# Altium PCB PCB1.PcbDoc
Units mm, origin at the board's own origin, x right, y up, seen from the top; angles counter-clockwise.
Board outline 75.06 x 79.25 mm, 2 copper layers (Top Layer, Bottom Layer); 20 components, 16 nets, 56 pads, 0 vias.
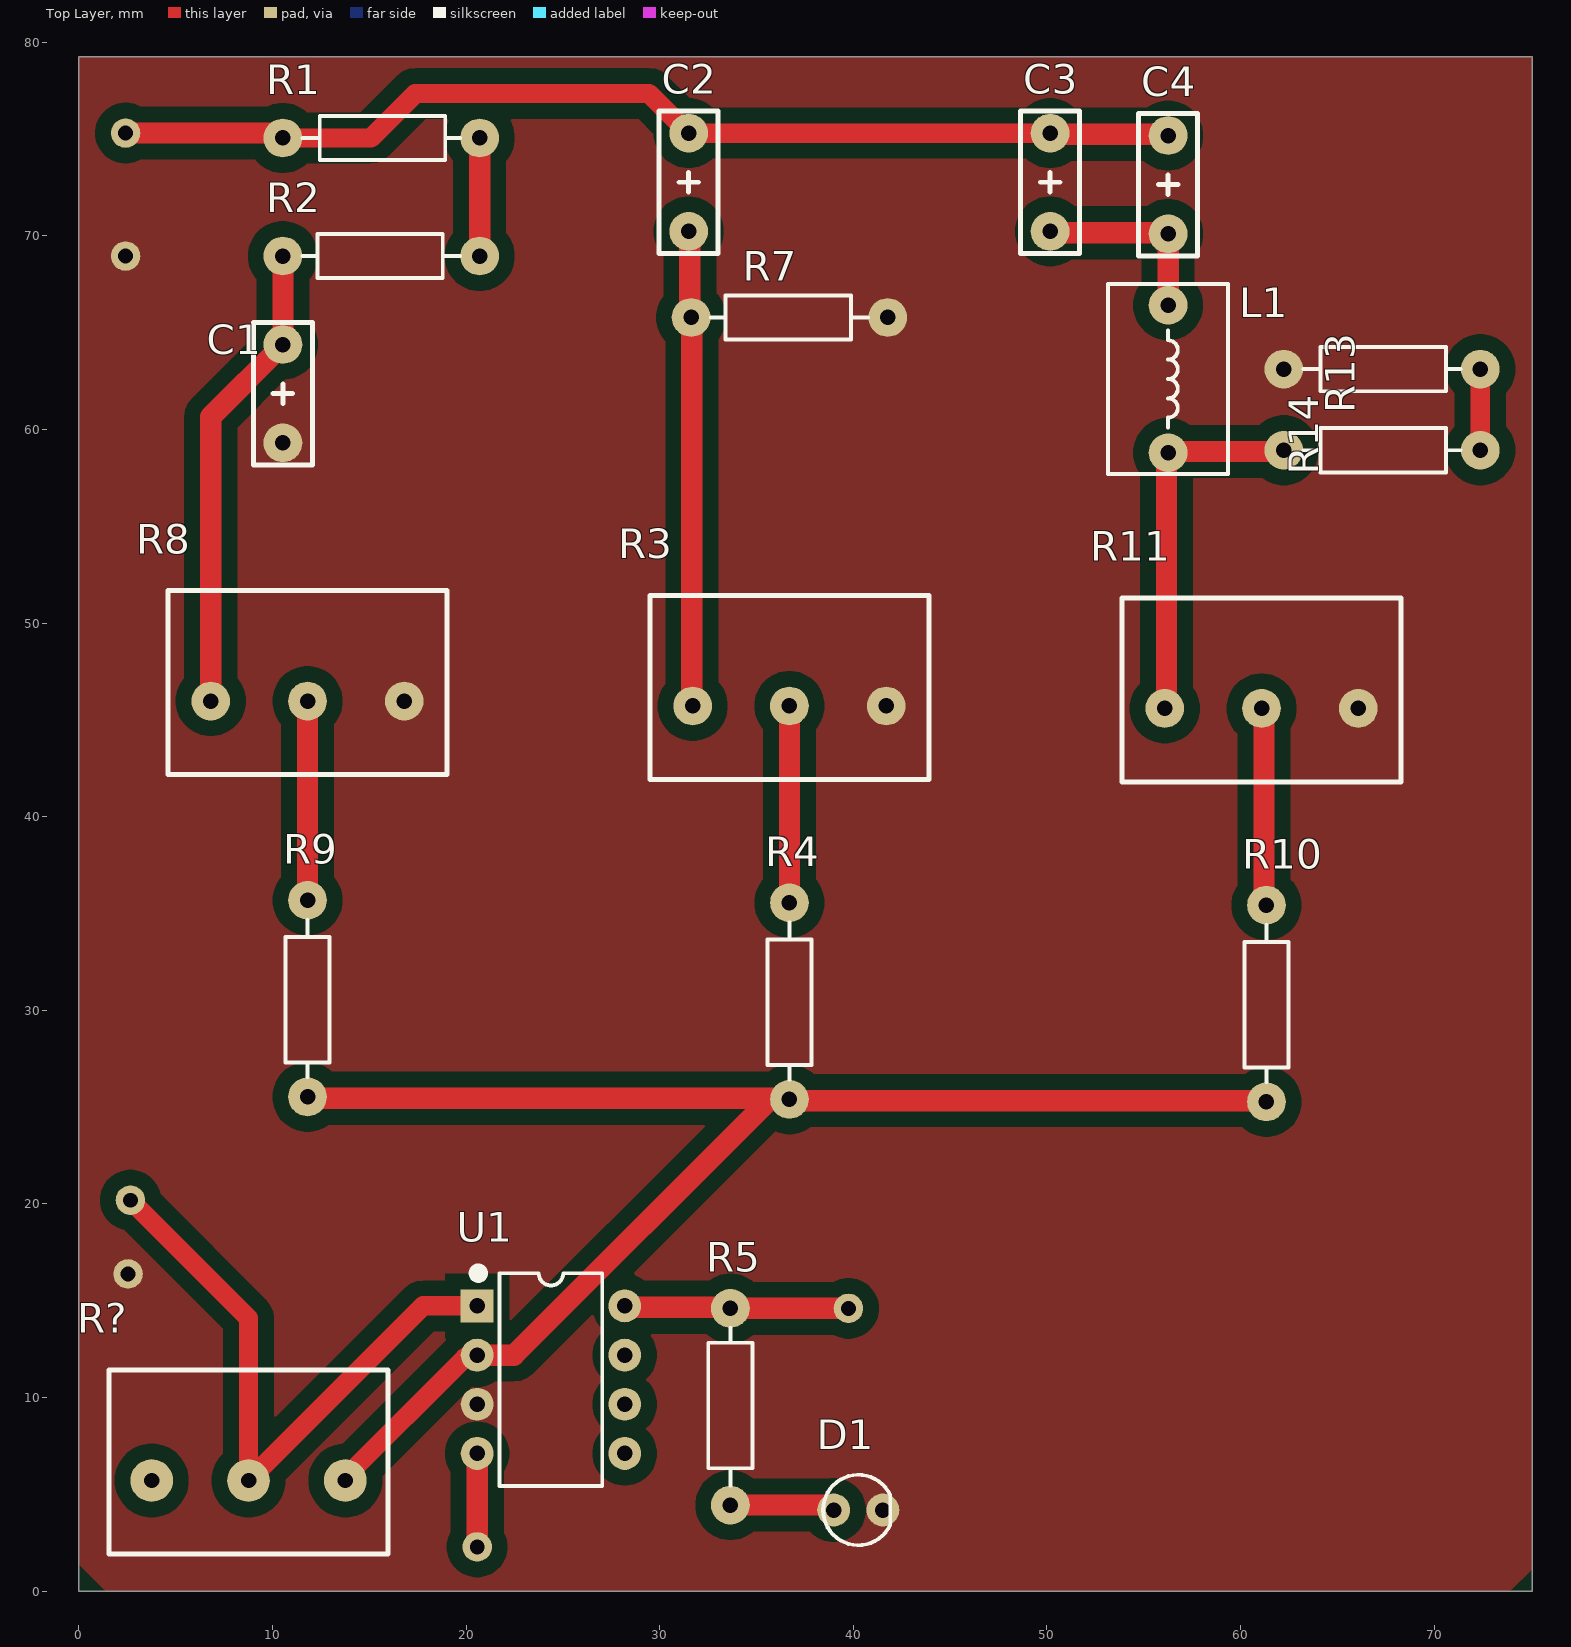
[diagram p0: Top Layer view]
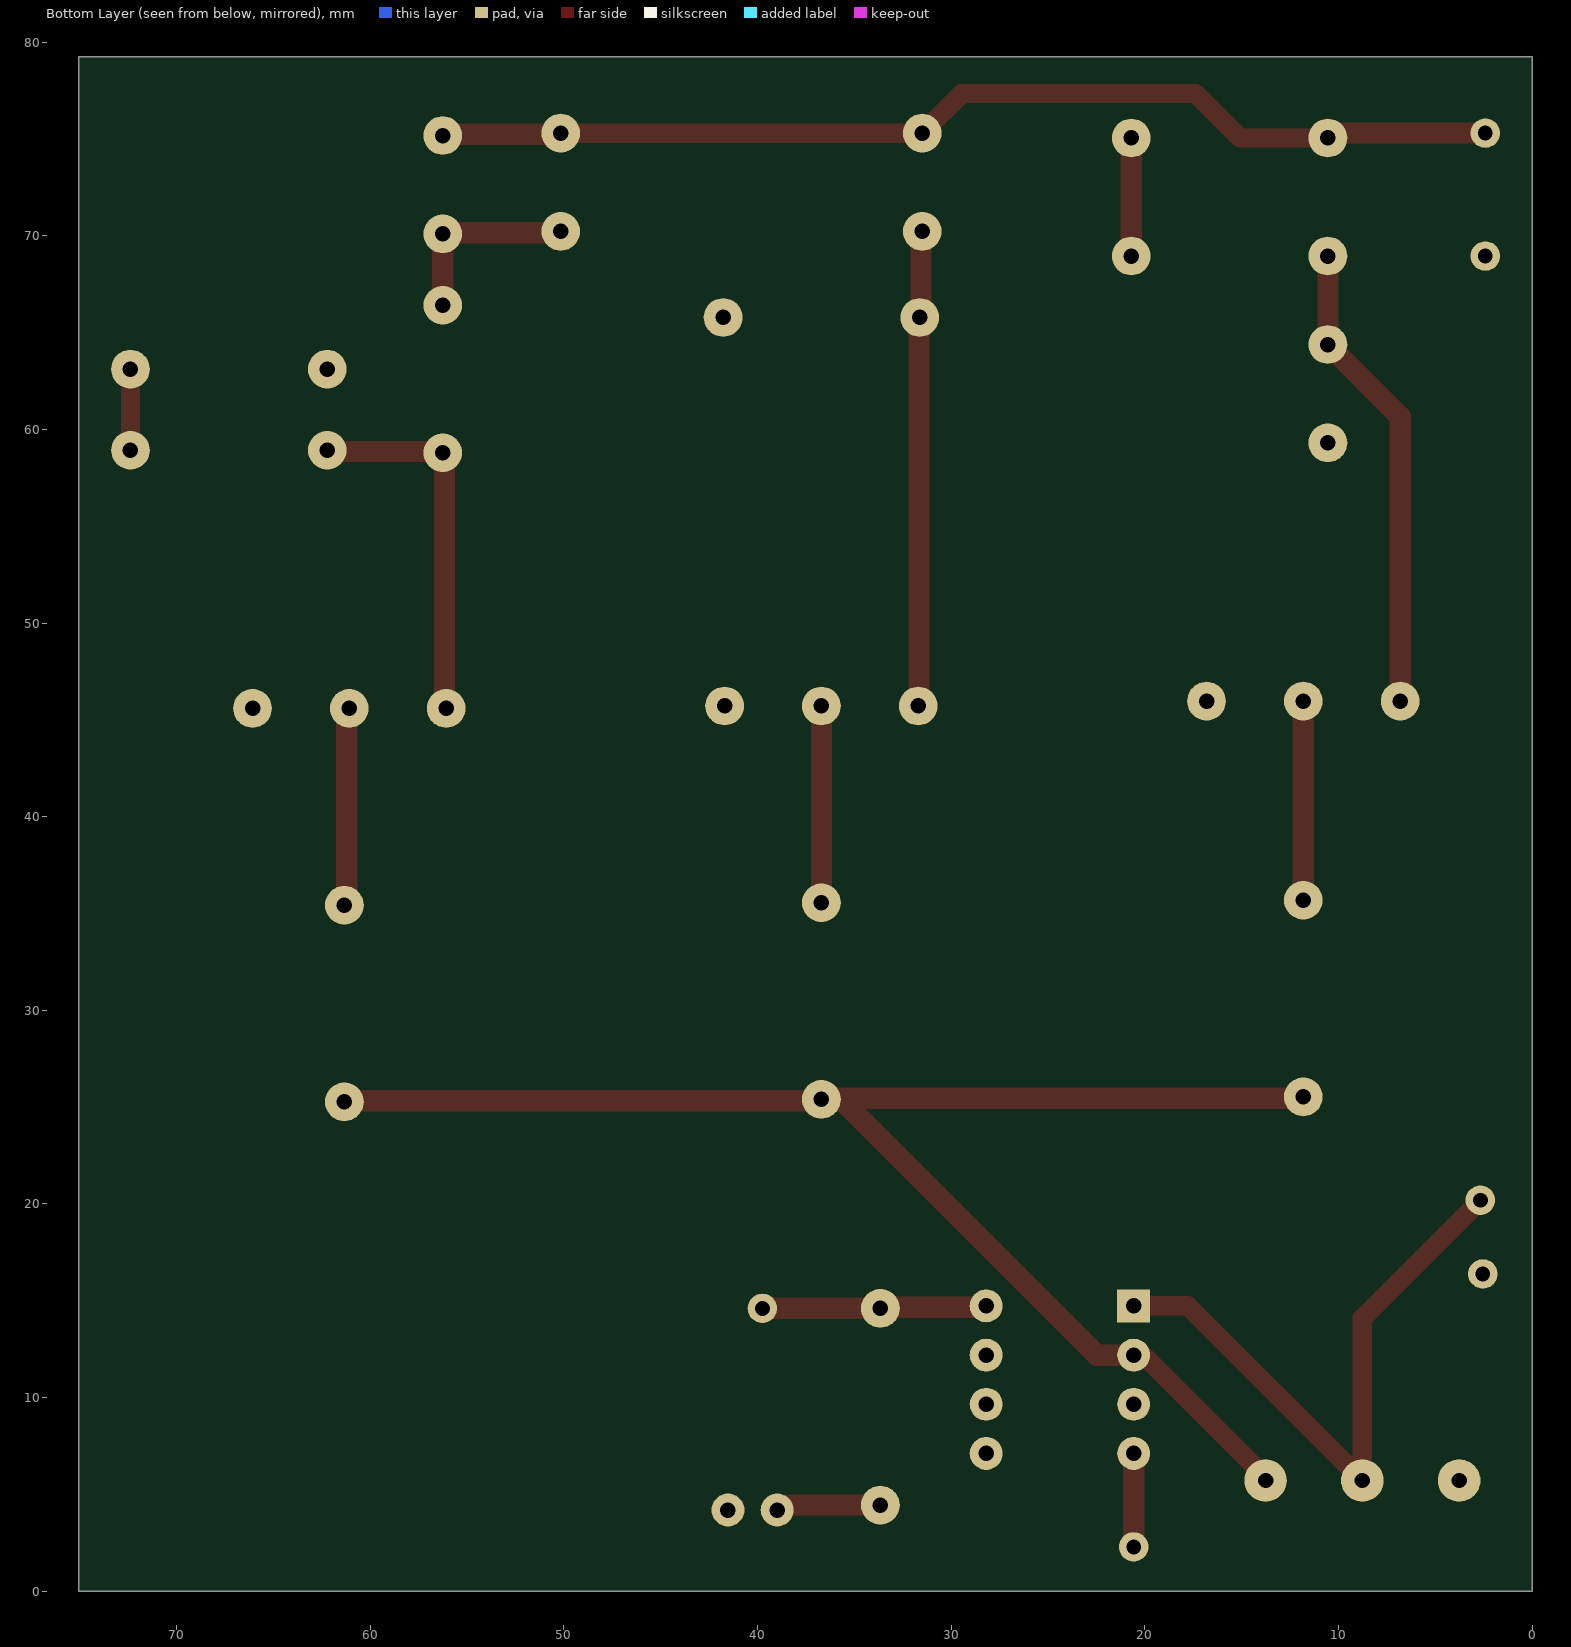
[diagram p1: Bottom Layer view, seen from below]
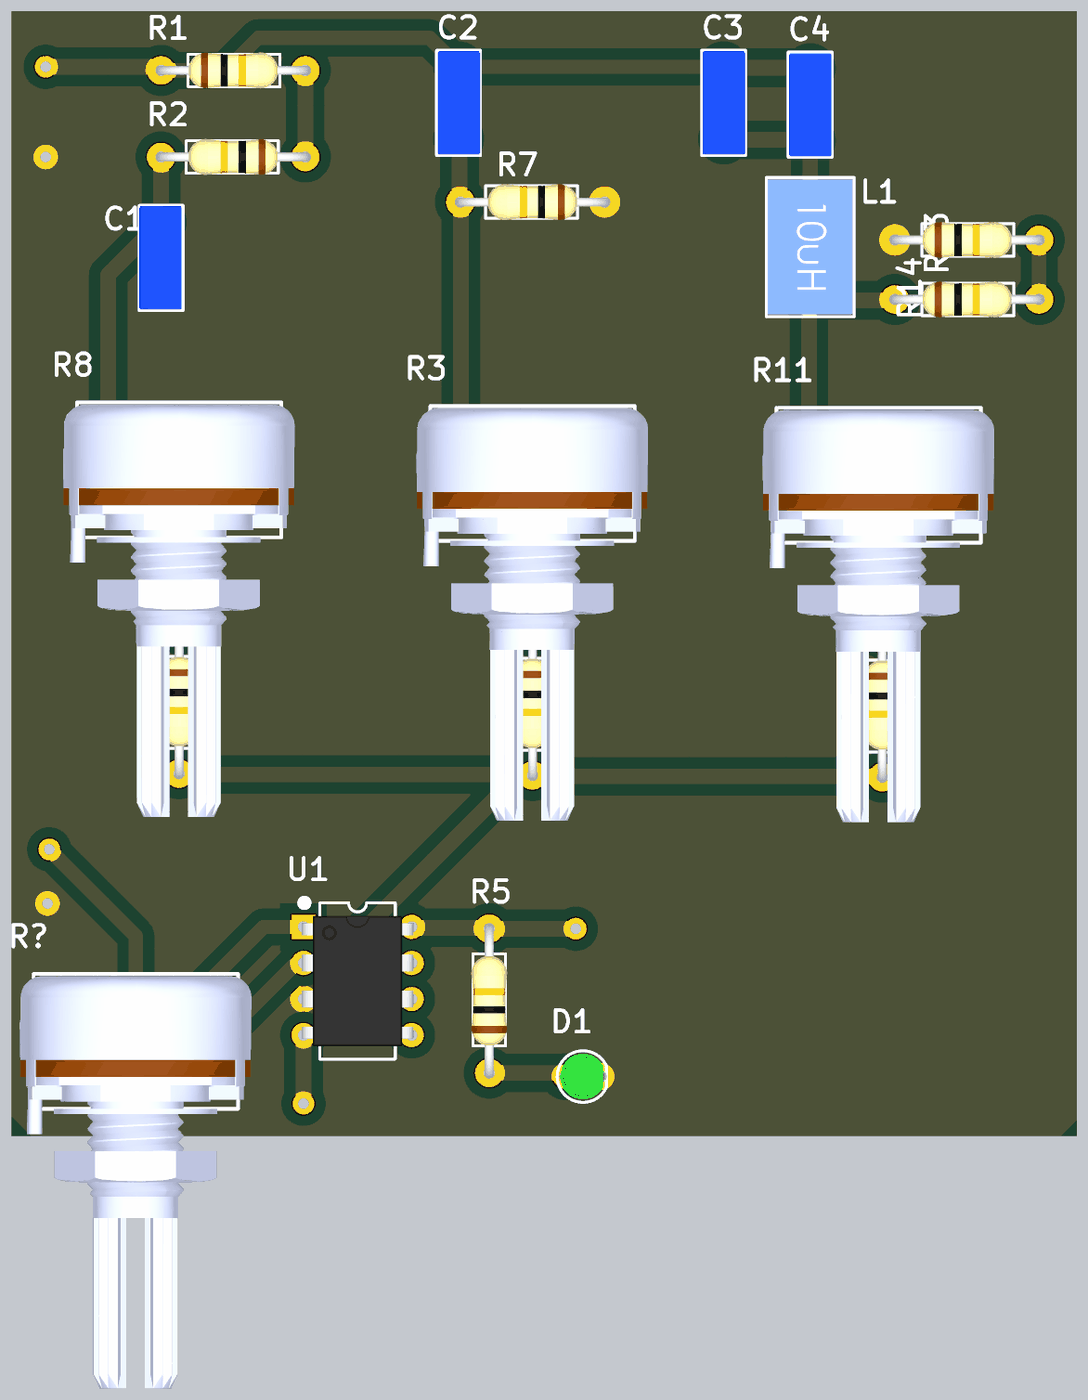
[diagram p2: 3D render of the assembled board from above, using the file's embedded part models]

## Layer stack, top to bottom
Top Solder: solder mask 0.0102, Solder Resist, Dk 3.5
Top Layer: signal copper 0.0356
Dielectric 1: dielectric 0.32, FR-4, Dk 4.8
Bottom Layer: signal copper 0.0356
Bottom Solder: solder mask 0.0102, Solder Resist, Dk 3.5

## Board outline
0,0 75.057,0 75.057,79.248 0,79.248

## Design rules (kind name [scope] priority, off if disabled: settings)
Clearance [All] p1: gap=0.8 ignorepadtopadclearanceinfootprint=FALSE except(0: Arc-Text Track-Text SMDPad-Text THPad-Text Via-Text Fill-Text Poly-Text Region-Text Text-Text)
ComponentClearance [All] p1: gap=0.3 collisioncheckmode=3 verticalgap=0.254 showdistances=FALSE
HoleSize HoleSize_1 [All] p1: absolutevalues=TRUE maxlimit=1 minlimit=0.6 maxpercent=80.000 minpercent=20.000
HoleToHoleClearance [All] p1: gap=0.1 allowstackedmicrovias=TRUE
MinimumSolderMaskSliver [All] p1: minsoldermaskwidth=0.05
PolygonConnect [All] p1: connectstyle=Relief reliefconductorwidth=0.4 reliefentries=4 polygonreliefangle="90 Angle" airgapwidth=0.4
RoutingVias [All] p1: holewidth=0.9 width=2 viastyle="Through Hole" minholewidth=0.9 minwidth=2 maxholewidth=0.9 maxwidth=2
SilkToSilkClearance [All] p1: silktosilkclearance=0
SilkToSolderMaskClearance [IsPad] p1: minsilkscreentomaskgap=0 clearancetoexposedcopper=TRUE
SolderMaskExpansion [All] p1: expansion=0.102 istentingtop=FALSE
Width [All] p1: maxlimit=1.2 minlimit=1 preferedwidth=1 minimp=50.000000 maximp=50.000000 favimp=50.000000
24 further rules are at their usual default settings.

## Components (designator, comment, footprint, x,y, rotation, side; value= is the part's Value field where it differs from the comment)
C1 "Cap Film 0.1uF" "Cap Film 0.1uF" 10.541,61.849 r270 top
C2 "Cap Film 0.1uF" "Cap Film 0.1uF" 31.496,72.771 r90 top
C3 "Cap Film 0.1uF" "Cap Film 0.1uF" 50.165,72.771 r90 top
C4 "Cap Film 0.1uF" "Cap Film 0.1uF" 56.261,72.644 r90 top
D1 "LED 3MM GREEN" "LED 3MM GREEN" 40.259,4.191 r0 top
L1 "68mH" "IND RAD 5MM" 56.261,62.611 r270 top
R1 "RES 470R 1/4W CARBON FILM" "RES 10K 1/4W CARBON FILM" 15.621,75.057 r0 top
R2 "RES 470R 1/4W CARBON FILM" "RES 10K 1/4W CARBON FILM" 15.621,68.961 r180 top
R3 "Pot 10k" "Pot 10k"#1 36.703,45.72 r180 top
R4 "RES 470R 1/4W CARBON FILM" "RES 10K 1/4W CARBON FILM" 36.703,30.48 r270 top
R5 "RES 470R 1/4W CARBON FILM" "RES 10K 1/4W CARBON FILM" 33.655,9.525 r90 top
R7 "RES 470R 1/4W CARBON FILM" "RES 10K 1/4W CARBON FILM" 36.703,65.786 r180 top
R8 "Pot 10k" "Pot 10k"#1 11.811,45.974 r180 top
R9 "RES 470R 1/4W CARBON FILM" "RES 10K 1/4W CARBON FILM" 11.811,30.607 r270 top
R10 "RES 470R 1/4W CARBON FILM" "RES 10K 1/4W CARBON FILM" 61.341,30.353 r270 top
R11 "Pot 10k" "Pot 10k"#1 61.087,45.593 r180 top
R13 "RES 470R 1/4W CARBON FILM" "RES 10K 1/4W CARBON FILM" 67.31,58.928 r0 top
R14 "RES 470R 1/4W CARBON FILM" "RES 10K 1/4W CARBON FILM" 67.31,63.119 r0 top
R? "Pot 10k" "Pot 10k"#2 8.763,5.715 r180 top
U1 "741" P008 24.384,10.922 r270 top

## Footprints (in the part's own frame and the unit in brackets; to place one, negate y for a bottom-side part, rotate by r counter-clockwise, add the part's x,y. Pads: shape width x height; smd on the part's side, far side on the other; paste and mask are expansions set on the pad)
"Cap Film 0.1uF" [mm] "Cap Film 0.1uF"
  round 2 hole 0.8: 1(2.54,0) 2(-2.54,0)
  silkscreen extent -3.68,-1.52 3.68,1.52, body extent -3.65,-1.52 3.65,1.48, height 6
"IND RAD 5MM" [mm]
  round 2 hole 0.8: 1(-3.81,0) 2(3.81,0)
  silkscreen extent -4.9,-3.1 4.9,3.1, body extent -4.76,-3 4.74,3, height 7
"LED 3MM GREEN" [mm]
  round 1.7 hole 0.8: 1(-1.27,0) 2(1.27,0)
  silkscreen extent -1.82,-1.82 1.65,1.82, body extent -1.6,-1.6 1.57,1.6, height 5.85
P008 [mm] "DIP; 8 Leads; Row Spacing 7.62 mm; Pitch 2.54 mm"
  rect 1.7x1.7 hole 0.8: 1(-3.81,-3.81)
  round 1.7 hole 0.8: 2(-1.27,-3.81) 3(1.27,-3.81) 4(3.81,-3.81) 5(3.81,3.81) 6(1.27,3.81) 7(-1.27,3.81) 8(-3.81,3.81)
  silkscreen extent -5.75,-4 5.5,2.65, body extent -4.6,-3.93 4.6,3.94, height 3.85
"Pot 10k"#1 [mm]
  round 2 hole 0.8: 1(-5,0) 2(0,0) 3(5,0)
  silkscreen extent -7.2,-5.7 7.2,3.8, body extent -8.15,-5.55 8.19,23.49, height 21.17
"Pot 10k"#2 [mm]
  round 2.2 hole 0.8: 1(-5,0) 2(0,0) 3(5,0)
  silkscreen extent -7.2,-5.7 7.2,3.8, body extent -8.15,-5.55 8.19,23.49, height 21.17
"RES 10K 1/4W CARBON FILM" [mm]
  round 2 hole 0.8: 1(-5.08,0) 2(5.08,0)
  silkscreen extent -4.06,-1.14 4.06,1.14, body extent -5.47,-1.27 5.47,1.27, height 3.27

## Part data
C1: library part "Cap Film 0.1uF - B32529C104K", "Cap Film 0.1uF 63V PET 10% (7.2 X 2.5 X 6.5mm) Radial 5mm 125C Bulk", Capacitance=330nF, Case/Package=Radial, Dielectric=PET, Insulation Resistance=15GR, Manufacturer="TDK EPCOS", Manufacturer Part Number=B32529C104K, Max Operating Temperature=125°C, Min Operating Temperature=-55°C, Package Quantity=2000, Supplier Part Number 1=21C0469, Tolerance=10%, Voltage Rating=63V, Voltage Rating (AC)=40V, ComponentLink1Description=http://www.farnell.com/datasheets/8708.pdf?src-supplier=Element14, ComponentLink1URL=http://www.farnell.com/datasheets/8708.pdf?src-supplier=Element14, ComponentLink2Description=https://www.distrelec.biz/Web/Downloads/_t/ds/b3252x_eng_tds.pdf?mime=application%2Fpdf&src-supplier=Distrelec, ComponentLink2URL=https://www.distrelec.biz/Web/Downloads/_t/ds/b3252x_eng_tds.pdf?mime=application%2Fpdf&src-supplier=Distrelec, ComponentLink3Description=http://www.farnell.com/datasheets/1955213.pdf?src-supplier=Farnell, ComponentLink3URL=http://www.farnell.com/datasheets/1955213.pdf?src-supplier=Farnell, ComponentLink4Description=https://www.verical.com/server-webapp/html/getDatasheet?partID=117180&src-supplier=Verical, ComponentLink4URL=https://www.verical.com/server-webapp/html/getDatasheet?partID=117180&src-supplier=Verical, ComponentLink5Description=https://produktinfo.conrad.com/datenblaetter/500000-524999/500871-da-01-en-METALLPOLYESTER_KONDENSATOR_0_10_UF.pdf?src-supplier=Conrad, ComponentLink5URL=https://produktinfo.conrad.com/datenblaetter/500000-524999/500871-da-01-en-METALLPOLYESTER_KONDENSATOR_0_10_UF.pdf?src-supplier=Conrad, Contact Plating=Matte,Tin, Depth=2.5mm, Dielectric Material=PET, Height=6.5mm, Height - Seated (Max)=0.256inch, Lead Diameter=0.5mm, Lead Free="Lead Free", Lead Length=6mm, Lead Pitch=5mm, Length=7.2mm, Life (Hours)=200000Hour, Material=PVC,Resin, Mount="PCB,Through Hole", Number of Pins=2, Packaging=Bulk, Pitch=5mm, Radiation Hardening=No, REACH SVHC="No SVHC", Stock 1=0, Supplier 1=Newark, Termination=Radial, Voltage Rating (DC)=63V, Width=2.5mm
C2 C4: library part "Cap Film 0.1uF - B32529C104K", "Cap Film 0.1uF 63V PET 10% (7.2 X 2.5 X 6.5mm) Radial 5mm 125C Bulk", Capacitance=47nF, Case/Package=Radial, Dielectric=PET, Insulation Resistance=15GR, Manufacturer="TDK EPCOS", Manufacturer Part Number=B32529C104K, Max Operating Temperature=125°C, Min Operating Temperature=-55°C, Package Quantity=2000, Supplier Part Number 1=21C0469, Tolerance=10%, Voltage Rating=63V, Voltage Rating (AC)=40V, ComponentLink1Description=http://www.farnell.com/datasheets/8708.pdf?src-supplier=Element14, ComponentLink1URL=http://www.farnell.com/datasheets/8708.pdf?src-supplier=Element14, ComponentLink2Description=https://www.distrelec.biz/Web/Downloads/_t/ds/b3252x_eng_tds.pdf?mime=application%2Fpdf&src-supplier=Distrelec, ComponentLink2URL=https://www.distrelec.biz/Web/Downloads/_t/ds/b3252x_eng_tds.pdf?mime=application%2Fpdf&src-supplier=Distrelec, ComponentLink3Description=http://www.farnell.com/datasheets/1955213.pdf?src-supplier=Farnell, ComponentLink3URL=http://www.farnell.com/datasheets/1955213.pdf?src-supplier=Farnell, ComponentLink4Description=https://www.verical.com/server-webapp/html/getDatasheet?partID=117180&src-supplier=Verical, ComponentLink4URL=https://www.verical.com/server-webapp/html/getDatasheet?partID=117180&src-supplier=Verical, ComponentLink5Description=https://produktinfo.conrad.com/datenblaetter/500000-524999/500871-da-01-en-METALLPOLYESTER_KONDENSATOR_0_10_UF.pdf?src-supplier=Conrad, ComponentLink5URL=https://produktinfo.conrad.com/datenblaetter/500000-524999/500871-da-01-en-METALLPOLYESTER_KONDENSATOR_0_10_UF.pdf?src-supplier=Conrad, Contact Plating=Matte,Tin, Depth=2.5mm, Dielectric Material=PET, Height=6.5mm, Height - Seated (Max)=0.256inch, Lead Diameter=0.5mm, Lead Free="Lead Free", Lead Length=6mm, Lead Pitch=5mm, Length=7.2mm, Life (Hours)=200000Hour, Material=PVC,Resin, Mount="PCB,Through Hole", Number of Pins=2, Packaging=Bulk, Pitch=5mm, Radiation Hardening=No, REACH SVHC="No SVHC", Stock 1=0, Supplier 1=Newark, Termination=Radial, Voltage Rating (DC)=63V, Width=2.5mm
C3: library part "Cap Film 0.1uF - B32529C104K", "Cap Film 0.1uF 63V PET 10% (7.2 X 2.5 X 6.5mm) Radial 5mm 125C Bulk", Capacitance=220nF, Case/Package=Radial, Dielectric=PET, Insulation Resistance=15GR, Manufacturer="TDK EPCOS", Manufacturer Part Number=B32529C104K, Max Operating Temperature=125°C, Min Operating Temperature=-55°C, Package Quantity=2000, Supplier Part Number 1=21C0469, Tolerance=10%, Voltage Rating=63V, Voltage Rating (AC)=40V, ComponentLink1Description=http://www.farnell.com/datasheets/8708.pdf?src-supplier=Element14, ComponentLink1URL=http://www.farnell.com/datasheets/8708.pdf?src-supplier=Element14, ComponentLink2Description=https://www.distrelec.biz/Web/Downloads/_t/ds/b3252x_eng_tds.pdf?mime=application%2Fpdf&src-supplier=Distrelec, ComponentLink2URL=https://www.distrelec.biz/Web/Downloads/_t/ds/b3252x_eng_tds.pdf?mime=application%2Fpdf&src-supplier=Distrelec, ComponentLink3Description=http://www.farnell.com/datasheets/1955213.pdf?src-supplier=Farnell, ComponentLink3URL=http://www.farnell.com/datasheets/1955213.pdf?src-supplier=Farnell, ComponentLink4Description=https://www.verical.com/server-webapp/html/getDatasheet?partID=117180&src-supplier=Verical, ComponentLink4URL=https://www.verical.com/server-webapp/html/getDatasheet?partID=117180&src-supplier=Verical, ComponentLink5Description=https://produktinfo.conrad.com/datenblaetter/500000-524999/500871-da-01-en-METALLPOLYESTER_KONDENSATOR_0_10_UF.pdf?src-supplier=Conrad, ComponentLink5URL=https://produktinfo.conrad.com/datenblaetter/500000-524999/500871-da-01-en-METALLPOLYESTER_KONDENSATOR_0_10_UF.pdf?src-supplier=Conrad, Contact Plating=Matte,Tin, Depth=2.5mm, Dielectric Material=PET, Height=6.5mm, Height - Seated (Max)=0.256inch, Lead Diameter=0.5mm, Lead Free="Lead Free", Lead Length=6mm, Lead Pitch=5mm, Length=7.2mm, Life (Hours)=200000Hour, Material=PVC,Resin, Mount="PCB,Through Hole", Number of Pins=2, Packaging=Bulk, Pitch=5mm, Radiation Hardening=No, REACH SVHC="No SVHC", Stock 1=0, Supplier 1=Newark, Termination=Radial, Voltage Rating (DC)=63V, Width=2.5mm
D1: Current If Luminous Intensity=20, Forward Voltage=2.2, Forward Voltage VF Max=2.5, LED Colour=Green, Manufacturer=Paralight, Manufacturer Part Number=IMP1019, Operating Temperature Max=85, Operating Temperature Min=-40, Operating Temperature Range="-40°C to +85", Peak Forward Current=140, Supplier Part Number 1="Led 3mm Verde Difuso L-314GD - Paralight", Voltage Vf Typ="2.2V<!--FANDB--><div class=\"features-and-benefits-container\"><div class=\"features-and-benefits-description\"><span class=\"features-benefits-value\">The L-934GD is a 3mm green solid-state LED Lamp with green diffused lens. The green source device is made with gallium phosphide.</span></div><div class=\"features-and-benefits-list\"><ul class=\"features-and-benefits-list-list\"><li class=\"features-and-benefits-list-item\">Low Power Consumption</li><li class=\"features-and-benefits-list-item\">Popular T-1 Diameter Package</li><li class=\"features-and-benefits-list-item\">General Purpose Leads</li><li class=\"features-and-benefits-list-item\">Reliable and Rugged</li><li class=\"features-and-benefits-list-item\">Long Life, Solid State Reliability</li></ul></div><div class=\"features-and-benefits-warnings\"><span class=\"features-benefits-value\">ESD sensitive device, take proper precaution while handling the device, wear anti-static suit when entering work areas with conductive machinery.</span></div><div class=\"features-and-benefits-applications\"><ul class=\"features-and-benefits-value\"><li class=\"features-and-benefits-list-item\">LED Lighting</li></ul></div></div>", Bulb Size=3mm, ComponentLink1Description=http://loja.multcomercial.com.br/led-3mm-verde-difuso-l-314gd-paralight.html, ComponentLink1URL=http://loja.multcomercial.com.br/led-3mm-verde-difuso-l-314gd-paralight.html, Dominant Wavelength=568, External Diameter=2.9, External Length / Height=4.6, Forward Current If=20, Forward Current If Max=20, Lead Cross-section Depth=0.5, Lead Cross-section Width=0.5, Lead Length=27, Lead Spacing=2.54, LED / Lamp Size="3mm / T-1", LED Mounting="Through Hole", LED Type=Standard, Lens Shape=Round, Luminous Intensity=20, Luminous Intensity @ If Min=8, Luminous Intensity Typ=20, Mounting Type="PCB Through Hole", MSL=-, No. of Pins=2, Packaging=Each, Peak Wavelength=568, PIV Max=5, Pricing 1="1=0,15 (BRL)", RoHS=YES, Stock 1=34348, Supplier 1="Mult Comercial", SVHC="No SVHC (15-Jun-2015)", Viewing Angle=60°, Wavelength Typ=568
L1: library part "Indutor 39 uH", "FIXED IND 39UH 1A 195 MOHM SMD", Case/Package=Nonstandard, Current Rating=1A, DC Resistance (DCR)=195mR, Inductance=39uH, Manufacturer=Bourns, Manufacturer Part Number=SRR6028-390Y, Max Operating Temperature=125°C, Min Operating Temperature=-40°C, Package Quantity=500, Saturation Current=750mA, Self Resonant Frequency=17MHz, Test Frequency=100kHz, Tolerance=30%, ComponentLink1Description=http://www.bourns.com/docs/Product-Datasheets/SRR6028.pdf?src-supplier=Digi-Key, ComponentLink1URL=http://www.bourns.com/docs/Product-Datasheets/SRR6028.pdf?src-supplier=Digi-Key, ComponentLink2Description=https://www.bourns.com/docs/Product-Datasheets/SRR6028.pdf?src-supplier=Digi-Key, ComponentLink2URL=https://www.bourns.com/docs/Product-Datasheets/SRR6028.pdf?src-supplier=Digi-Key, ComponentLink3Description=http://www.bourns.com/pdfs/SRR6028.pdf?src-supplier=Avnet+Europe, ComponentLink3URL=http://www.bourns.com/pdfs/SRR6028.pdf?src-supplier=Avnet+Europe, Composition=Wirewound, Core Material=Ferrite, Height=2.8mm, Height - Seated (Max)=0.118inch, Length=0.268inch, Max DC Current=1A, Mount="Surface Mount", Packaging="Tape and Reel", Q Factor=10, Shielding=Shielded, Stock 1=0, Supplier 1=Arrow, Supplier Part Number 1=SRR6028-390Y, Termination=SMD/SMT, Width=0.268inch
R1: "RES 470R OHM 1/4W 5% CARBON FILM", Manufacturer=Ty-Ohm, Manufacturer Part Number=CR25, Operating Temperature="-55°C ~ 155°C", Package / Case=Axial, Power (Watts)="0.25W, 1/4W", Resistance (Ohms)=150R, Supplier Part Number 1="Resistor de Filme de Carbono 1/4 de Watt CR25 5% de tolerância - 0.22R Ω à 10M Ω", Temperature Coefficient="0/ -500ppm/°C", Tolerance=±5%, Category=Resistors, ComponentLink1Description=http://loja.multcomercial.com.br/resistor-de-1-4-de-watt-cr25-5-de-tolerancia.html, ComponentLink1URL=http://loja.multcomercial.com.br/resistor-de-1-4-de-watt-cr25-5-de-tolerancia.html, Composition="Carbon Film", Features="Flame Retardant Coating, Safety", Height=-, Number of Terminations=2, Packaging="Cut Tape (CT)", Pricing 1="1=0.20 (BRL)", RoHS="RoHS Compliant", Size / Dimension="0.091\" Dia x 0.256\" L (2.30mm x 6.50mm)", Stock 1=617543, Supplier 1="Mult Comercial", Supplier Device Package=Axial
R2 R7 R14: "RES 470R OHM 1/4W 5% CARBON FILM", Manufacturer=Ty-Ohm, Manufacturer Part Number=CR25, Operating Temperature="-55°C ~ 155°C", Package / Case=Axial, Power (Watts)="0.25W, 1/4W", Resistance (Ohms)=1k, Supplier Part Number 1="Resistor de Filme de Carbono 1/4 de Watt CR25 5% de tolerância - 0.22R Ω à 10M Ω", Temperature Coefficient="0/ -500ppm/°C", Tolerance=±5%, Category=Resistors, ComponentLink1Description=http://loja.multcomercial.com.br/resistor-de-1-4-de-watt-cr25-5-de-tolerancia.html, ComponentLink1URL=http://loja.multcomercial.com.br/resistor-de-1-4-de-watt-cr25-5-de-tolerancia.html, Composition="Carbon Film", Features="Flame Retardant Coating, Safety", Height=-, Number of Terminations=2, Packaging="Cut Tape (CT)", Pricing 1="1=0.20 (BRL)", RoHS="RoHS Compliant", Size / Dimension="0.091\" Dia x 0.256\" L (2.30mm x 6.50mm)", Stock 1=617543, Supplier 1="Mult Comercial", Supplier Device Package=Axial
R3 R8 R11 R?: "POT 10K OHM 1/20W PLASTIC LINEAR", Manufacturer="TT Electronics/BI", Manufacturer Part Number=P120PK-Y25BR10K, Power (Watts)="0.05W, 1/20W", Resistance (Ohms)=10k, Resistive Material="Conductive Plastic", Supplier Part Number 1=987-1710-ND, Temperature Coefficient=-, Tolerance=±20%, Actuator Diameter="0.236\" (6.00mm)", Actuator Length="0.984\" (25.00mm)", Actuator Type=Knurled, Adjustment Type="Top Adjustment", Built in Switch=None, Bushing Thread=-, Category="Potentiometers, Variable Resistors", ComponentLink1Description=http://www.ttelectronics.com/sites/default/files/download-files/Datasheet_RotaryPanelPot_P120series.pdf, ComponentLink1URL=http://www.ttelectronics.com/sites/default/files/download-files/Datasheet_RotaryPanelPot_P120series.pdf, Mounting Type="Through Hole, Snap In", Number of Turns=1, Packaging=Tray, Part Status=Active, Pricing 1="1=0.6, 10=0.553, 25=0.4932, 50=0.476, 100=0.442, 250=0.43352, 500=0.3995, 1000=0.34, 5000=0.2805 (USD)", RoHS="RoHS Compliant", Rotation=300°, Stock 1=1210, Supplier 1=Digi-Key, Taper=Linear, Termination Style="PC Pins, Board Locks"
R4 R9 R10: "RES 470R OHM 1/4W 5% CARBON FILM", Manufacturer=Ty-Ohm, Manufacturer Part Number=CR25, Operating Temperature="-55°C ~ 155°C", Package / Case=Axial, Power (Watts)="0.25W, 1/4W", Resistance (Ohms)=470R, Supplier Part Number 1="Resistor de Filme de Carbono 1/4 de Watt CR25 5% de tolerância - 0.22R Ω à 10M Ω", Temperature Coefficient="0/ -500ppm/°C", Tolerance=±5%, Category=Resistors, ComponentLink1Description=http://loja.multcomercial.com.br/resistor-de-1-4-de-watt-cr25-5-de-tolerancia.html, ComponentLink1URL=http://loja.multcomercial.com.br/resistor-de-1-4-de-watt-cr25-5-de-tolerancia.html, Composition="Carbon Film", Features="Flame Retardant Coating, Safety", Height=-, Number of Terminations=2, Packaging="Cut Tape (CT)", Pricing 1="1=0.20 (BRL)", RoHS="RoHS Compliant", Size / Dimension="0.091\" Dia x 0.256\" L (2.30mm x 6.50mm)", Stock 1=617543, Supplier 1="Mult Comercial", Supplier Device Package=Axial
R5: "RES 470R OHM 1/4W 5% CARBON FILM", Manufacturer=Ty-Ohm, Manufacturer Part Number=CR25, Operating Temperature="-55°C ~ 155°C", Package / Case=Axial, Power (Watts)="0.25W, 1/4W", Resistance (Ohms)=270R, Supplier Part Number 1="Resistor de Filme de Carbono 1/4 de Watt CR25 5% de tolerância - 0.22R Ω à 10M Ω", Temperature Coefficient="0/ -500ppm/°C", Tolerance=±5%, Category=Resistors, ComponentLink1Description=http://loja.multcomercial.com.br/resistor-de-1-4-de-watt-cr25-5-de-tolerancia.html, ComponentLink1URL=http://loja.multcomercial.com.br/resistor-de-1-4-de-watt-cr25-5-de-tolerancia.html, Composition="Carbon Film", Features="Flame Retardant Coating, Safety", Height=-, Number of Terminations=2, Packaging="Cut Tape (CT)", Pricing 1="1=0.20 (BRL)", RoHS="RoHS Compliant", Size / Dimension="0.091\" Dia x 0.256\" L (2.30mm x 6.50mm)", Stock 1=617543, Supplier 1="Mult Comercial", Supplier Device Package=Axial
R13: "RES 470R OHM 1/4W 5% CARBON FILM", Manufacturer=Ty-Ohm, Manufacturer Part Number=CR25, Operating Temperature="-55°C ~ 155°C", Package / Case=Axial, Power (Watts)="0.25W, 1/4W", Resistance (Ohms)=130R, Supplier Part Number 1="Resistor de Filme de Carbono 1/4 de Watt CR25 5% de tolerância - 0.22R Ω à 10M Ω", Temperature Coefficient="0/ -500ppm/°C", Tolerance=±5%, Category=Resistors, ComponentLink1Description=http://loja.multcomercial.com.br/resistor-de-1-4-de-watt-cr25-5-de-tolerancia.html, ComponentLink1URL=http://loja.multcomercial.com.br/resistor-de-1-4-de-watt-cr25-5-de-tolerancia.html, Composition="Carbon Film", Features="Flame Retardant Coating, Safety", Height=-, Number of Terminations=2, Packaging="Cut Tape (CT)", Pricing 1="1=0.20 (BRL)", RoHS="RoHS Compliant", Size / Dimension="0.091\" Dia x 0.256\" L (2.30mm x 6.50mm)", Stock 1=617543, Supplier 1="Mult Comercial", Supplier Device Package=Axial
U1: library part LM358AP, "Dual Operational Amplifier", Code_JEDEC=MO-001-AN, ComponentLink1Description="Manufacturer Link", ComponentLink1URL=http://www.ti.com/, ComponentLink2Description=Datasheet, ComponentLink2URL=http://www-s.ti.com/sc/ds/lm358.pdf, DatasheetVersion=Aug-1988, LatestRevisionDate=04-Mar-2005, LatestRevisionNote="Stylized 3D Model Added.", PackageDescription="DIP; 8 Leads; Row Spacing 7.62 mm; Pitch 2.54 mm", PackageReference=P008, PackageVersion=Jun-1999, Published=15-Apr-2002, Publisher="Altium Limited"

## Free pads (board coordinates)
  round 1.524 hole 0.762: 3(2.667,20.193) 4(2.54,16.383) 7(20.574,2.286) 8(2.413,75.311) 9(2.413,68.961) ""(39.751,14.605)

## Nets (pads, with @x,y where several pads share a name; then routed paths per layer and width w, separated by ;. In a path a pad name is that pad's centre, name@x,y a point inside that pad or via, vN(x,y) a via of type N, cw(c..) or ccw(c..) an arc to the next point about the centre after c; other vN are vias at no path point)
+6V: pad. R5.2 U1.8 | length 11.6
  Top Layer w1.1: U1.8 28.258,14.668 33.591,14.668 R5.2 pad.
-6V: pad.7 U1.4 | length 4.8
  Top Layer w1.1: pad.7 U1.4
Auto-Falante: pad.3 R?.2 U1.1 | length 32.5
  Top Layer w1: pad.3 8.763,14.097 R?.2 17.78,14.732 U1.1
GND: C1.1 D1.2 pad.4 pad.9 R3.1 R7.1 R8.1 R11.1 R14.1 U1.3
NetC3_2: C3.2 C4.2 L1.1 | length 9.8
  Top Layer w1.1: C3.2 50.228,70.168 56.197,70.168 C4.2 L1.1
NetD1_1: D1.1 R5.1 | length 5.4
  Top Layer w1.1: R5.1 38.573,4.445 38.827,4.191 D1.1
NetR1_2: R1.2 R2.1 | length 6.1
  Top Layer w1.1: R2.1 R1.2
NetR3_2: R3.2 R4.1 | length 10.2
  Top Layer w1.1: R4.1 R3.2
NetR4_2: R4.2 R9.2 R10.2 R?.1 U1.2 | length 79.9
  Top Layer w1: R?.1 13.763,5.882 19.94,12.058 20.44,12.058 U1.2
  Top Layer w1.1: R9.2 11.874,25.463 R4.2@35.75,25.463 ; U1.2 22.479,12.192 R4.2@35.75,25.463 ; R10.2 61.278,25.336 36.767,25.336 R4.2 36.64,25.463 R4.2@35.75,25.463
NetR8_2: R8.2 R9.1 | length 10.3
  Top Layer w1.1: R9.1 R8.2
NetR10_1: R10.1 R11.2 | length 10.3
  Top Layer w1.1: R11.2 61.214,45.466 61.214,35.56 R10.1
NetR13_2: R13.2 R14.2 | length 4.2
  Top Layer w1: R13.2 R14.2
PA: C2.2 R3.3 R7.2 | length 24.6
  Top Layer w1.1: C2.2 31.559,70.168 31.559,65.849 R7.2 31.663,65.746 31.663,45.76 R3.3
PB: C1.2 R2.2 R8.3 | length 24.5
  Top Layer w1.1: R8.3 6.811,60.659 C1.2 R2.2
PF: L1.2 R11.3 R13.1 | length 19.3
  Top Layer w1.1: R11.3 56.174,45.68 56.174,58.714 L1.2 56.325,58.864 62.166,58.864 R13.1
Sinal_In: C2.1 C3.1 C4.1 pad.8 R1.1 | length 55.8
  Top Layer w1: R1.1 15.083,75.057 17.383,77.357 29.45,77.357 C2.1 C3.1
  Top Layer w1.1: pad.8 10.043,75.311 10.297,75.057 R1.1 ; C3.1 50.228,75.248 56.197,75.248 C4.1
pads on no net: R?.3 U1.5 U1.6 U1.7

## Polygon pours and split planes (outlines as drawn)
GND on Top Layer "GND_L01_P000" (solid, pour order 0): 0,79.248 75.057,79.248 75.057,1.143 73.914,0 1.397,0 0,1.397

## Text inside footprints (layer, text, board x,y; h text height)
D1: Mechanical 29 "A" at 39.116,2.667 h0.5; Mechanical 29 "K" at 40.894,2.667 h0.5
L1: Mechanical 29 "1" at 54.861,65.311 h0.5 r270
R1: Mechanical 29 "1" at 11.684,74.041 h0.5
R2: Mechanical 29 "1" at 19.558,69.977 h0.5 r180
R4: Mechanical 29 "1" at 35.687,34.417 h0.5 r270
R5: Mechanical 29 "1" at 34.671,5.588 h0.5 r90
R7: Mechanical 29 "1" at 40.64,66.802 h0.5 r180
R9: Mechanical 29 "1" at 10.795,34.544 h0.5 r270
R10: Mechanical 29 "1" at 60.325,34.29 h0.5 r270
R13: Mechanical 29 "1" at 63.373,57.912 h0.5
R14: Mechanical 29 "1" at 63.373,62.103 h0.5